# Altium PCB SX1308_V2.PcbDoc
Units mil, origin at the board's own origin, x right, y up, seen from the top; angles counter-clockwise.
Board outline 755 x 570 mil, 2 copper layers (Top Layer, Bottom Layer); 15 components, 7 nets, 33 pads, 42 vias.
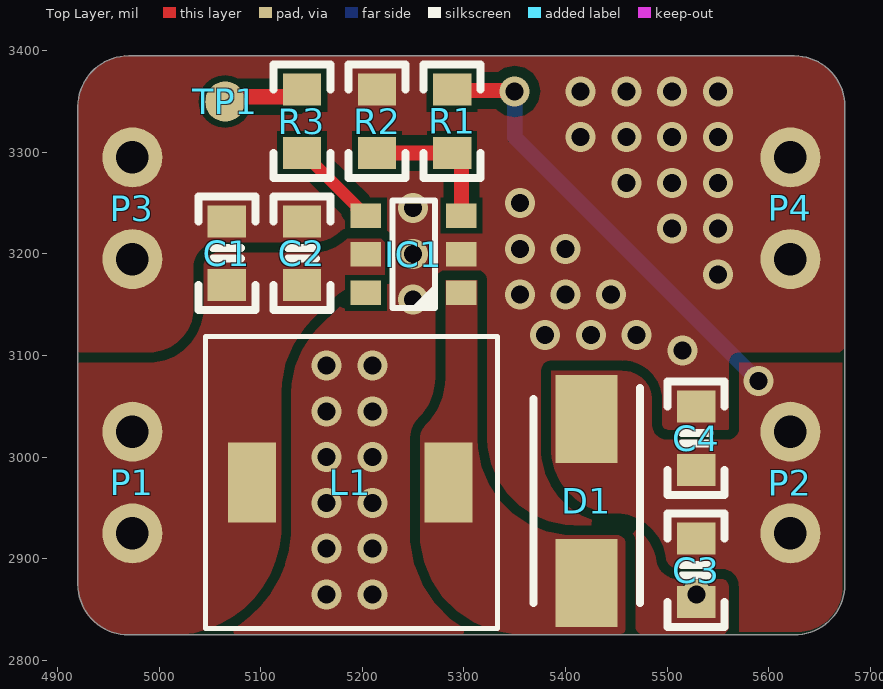
[diagram p0: Top Layer view]
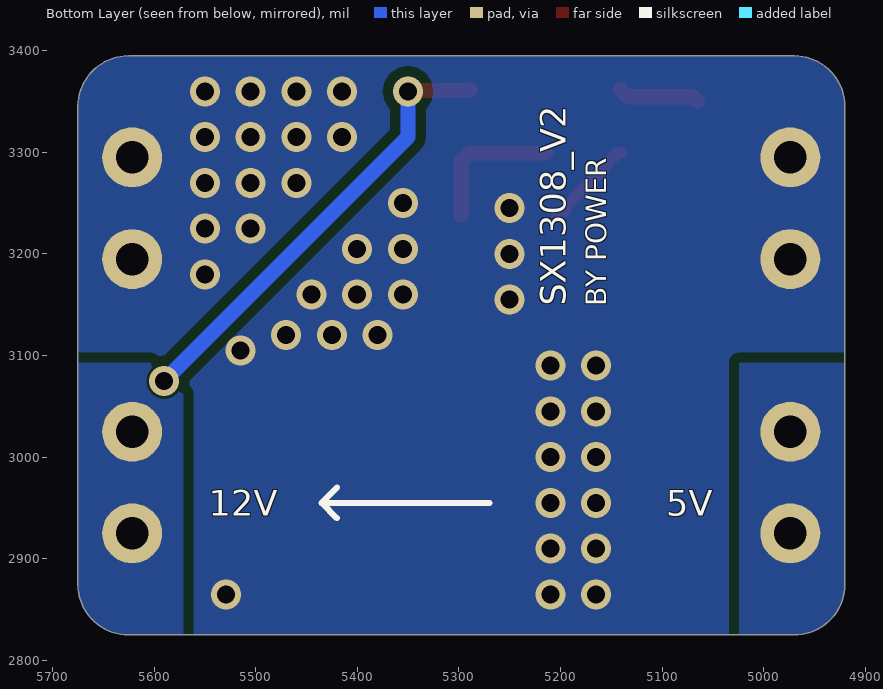
[diagram p1: Bottom Layer view, seen from below]
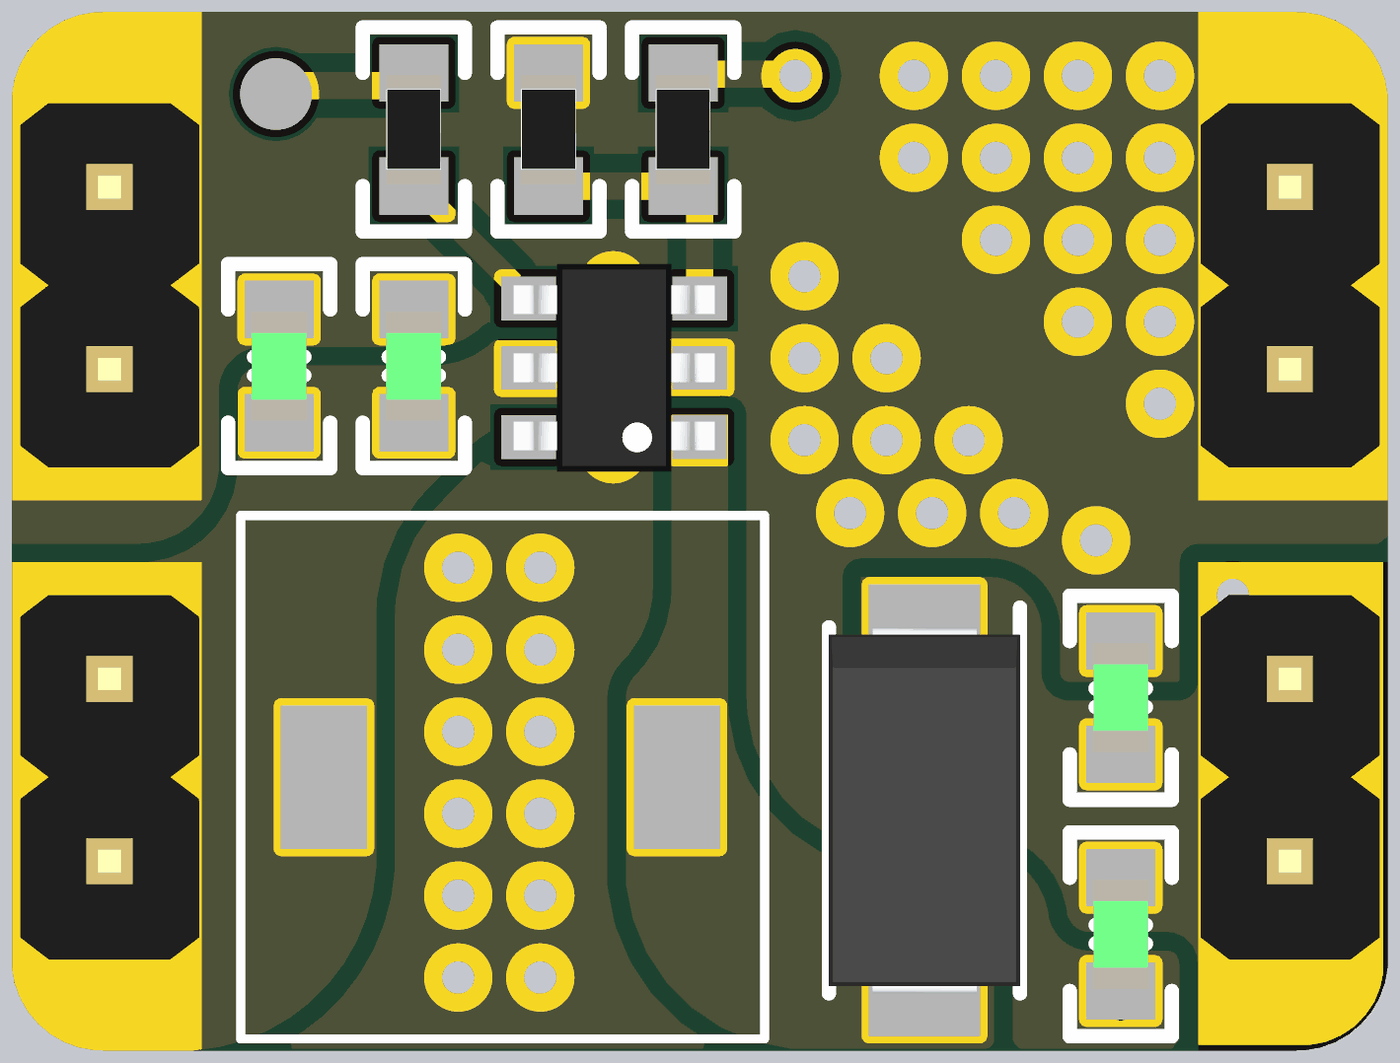
[diagram p2: 3D render of the assembled board from above, using the file's embedded part models]

## Layer stack, top to bottom
Top Solder: solder mask 0.4, Solder Resist, Dk 3.5
Top Layer: signal copper 1.4
Dielectric 1: dielectric 12.6, FR-4, Dk 4.8
Bottom Layer: signal copper 1.4
Bottom Solder: solder mask 0.4, Solder Resist, Dk 3.5

## Board outline
4920,2875 ccw(c4970,2875) 4970,2825 5625,2825 ccw(c5625,2875) 5675,2875 5675,3345 ccw(c5625,3345) 5625,3395 4970,3395 ccw(c4970,3345) 4920,3345

## Design rules (kind name [scope] priority, off if disabled: settings)
Clearance 1 [InNamedPolygon('NONET_L01_P-001')] p1: gap=10 ignorepadtopadclearanceinfootprint=FALSE except(0: Arc-Hole Track-Hole SMDPad-Hole THPad-Hole Via-Hole Fill-Hole Poly-Hole Region-Hole Text-Hole; 6: SMDPad-Fill SMDPad-Poly SMDPad-Region)
Clearance [All] p2: gap=10 ignorepadtopadclearanceinfootprint=FALSE except(0: Arc-Hole Track-Hole SMDPad-Hole THPad-Hole Via-Hole Fill-Hole Poly-Hole Region-Hole Text-Hole; 15: Arc-Fill Arc-Poly Arc-Region Track-Fill Track-Poly Track-Region SMDPad-Fill SMDPad-Poly SMDPad-Region THPad-Fill THPad-Poly THPad-Region Via-Fill Via-Poly Via-Region Fill-Fill Fill-Poly Fill-Region Poly-Poly Poly-Region Region-Region)
PlaneConnect [All] p1: planeconnectstyle=Direct reliefexpansion=20 reliefentries=4 reliefconductorwidth=10 reliefairgap=10
PolygonConnect [All] p1: connectstyle=Direct reliefconductorwidth=10 reliefentries=4 polygonreliefangle="90 Angle" airgapwidth=10
RoutingVias [All] p1: holewidth=17.72 width=29.53 viastyle="Through Hole" minholewidth=17.72 minwidth=29.53 maxholewidth=17.72 maxwidth=29.53
SolderMaskExpansion [All] p1: expansion=4 istentingtop=FALSE
Width [All] p1: maxlimit=100 minlimit=10 preferedwidth=15
29 further rules are at their usual default settings.

## Components (designator, comment, footprint, x,y, rotation, side; value= is the part's Value field where it differs from the comment)
C1 "10uF/25V" CAP-0603 5066.74,3200.66 r270 top
C2 "10uF/25V" CAP-0603 5140.62,3200.66 r270 top
C3 "10uF/25V" CAP-0603 5528.49,2888.74 r90 top
C4 "10uF/25V" CAP-0603 5528.49,3018.62 r270 top
D1 "SS34" DO-214AC_SMA 5420.8,2956.82 r270 top locked
IC1 "SX1308" SOT-23-6 5250.57,3199.72 r0 top
L1 "4.7uH/4A" SMD_7.3x7.3x4.2mm 5170.83,2960.43 r0 top locked
P1 "HDR1x2_2.54" HDR1X2_2.54_180 4973.79,3025 r0 top
P2 "HDR1x2_2.54" HDR1X2_2.54_180 5621.44,3025 r0 top
P3 "HDR1x2_2.54" HDR1X2_2.54_180 4973.79,3295 r0 top
P4 "HDR1x2_2.54" HDR1X2_2.54_180 5621.44,3295 r0 top
R1 "191k" R-0603 5288.39,3330.54 r90 top
R2 "10k" R-0603 5214.51,3330.54 r270 top
R3 "100k" R-0603 5140.62,3330.54 r270 top
TP1 "TestPoint" TestPoint 5065,3350 r90 top

## Footprints (in the part's own frame and the unit in brackets; to place one, negate y for a bottom-side part, rotate by r counter-clockwise, add the part's x,y. Pads: shape width x height; smd on the part's side, far side on the other; paste and mask are expansions set on the pad)
CAP-0603 [mm]
  rect 0.8x0.96 smd: 1(-0.79,0) 2(0.79,0)
  silkscreen extent -1.42,-0.71 1.42,0.71, body extent -0.76,-0.39 0.76,0.39, height 0.9
DO-214AC_SMA [mm]
  rect 2.2x1.55 smd: 1(2.05,0) 2(-2.05,0)
  silkscreen extent -2.83,-1.33 2.55,1.33, body extent -2.55,-1.33 2.55,1.33, height 2.29
HDR1X2_2.54_180 [mm]
  round 1.5 hole 0.813: 1(0,0) 2(0,-2.54)
  body extent -1.25,-3.81 1.25,1.27, height 8.2
R-0603 [mm]
  rect 0.8x0.96 smd: 1(-0.79,0) 2(0.79,0)
  silkscreen extent -1.42,-0.71 1.42,0.71, body extent -0.76,-0.38 0.76,0.38, height 0.41
SMD_7.3x7.3x4.2mm [mm]
  rect 1.2x2 smd: 1(-2.02,0.37) 2(2.9,0.37)
  silkscreen extent -3.18,-3.28 4.12,4.02, body extent -3.18,-3.28 4.1,4, height 3
SOT-23-6 [mil]
  rect 30x24 smd: 1(47,-38) 2(47,0) 3(47,38) 4(-47,38) 5(-47,0) 6(-47,-38)
  silkscreen extent -21,-53 21,53, body extent -55,-57 55,57, height 57
TestPoint [mm]
  round 1 smd: 1(0,0)

## Part data
C1 C2 C3 C4: library part CAP, "X7R", Package=0402, SuppliersPartNumber=C52923, ComponentLink1Description=供应商链接, ComponentLink1URL=http://www.szlcsc.com/product/details_53938.html, Supplier=LC
D1: library part DIODE, "肖特基二极管", Package=SMA(DO-214AC), SuppliersPartNumber=C22452, ComponentLink1Description=供应商链接, ComponentLink1URL=http://www.szlcsc.com/product/details_23178.html, Supplier=LC
IC1: "集成升压芯片", Manufacturer_Name="Shenzhen Suosemi Tech", Datasheet Link=https://datasheet.lcsc.com/szlcsc/Shenzhen-Suosemi-Tech-SX1308_C78162.pdf, Height=1.45mm, Manufacturer_Part_Number=SX1308
L1: library part INDUCTOR, "电感", Package=0402, SuppliersPartNumber=C32041, ComponentLink1Description=供应商链接, ComponentLink1URL=http://www.szlcsc.com/product/details_33003.html, Supplier=LC
P1 P2 P3 P4: "Header"
R1 R2 R3: library part RES, "贴片电阻", Package=0805, SuppliersPartNumber=C17798, Supplier=LC
TP1: "测试点"

## Via types
v1: diameter 29.53, hole 17.72, Top Layer to Bottom Layer, 42 vias

## Nets (pads, with @x,y where several pads share a name; then routed paths per layer and width w, separated by ;. In a path a pad name is that pad's centre, name@x,y a point inside that pad or via, vN(x,y) a via of type N, cw(c..) or ccw(c..) an arc to the next point about the centre after c; other vN are vias at no path point)
5V: C1.2 C2.2 IC1.5 L1.1 P1.1 P1.2
12V: C3.2 C4.2 D1.2 P2.1 P2.2 R1.2 | length 446.7
  Top Layer w15: R1.2 5289.21,3360.82 5349.18,3360.82 v1(5350,3360)
  Bottom Layer w15: v1(5350,3360) 5350,3315 v1(5590,3075)
GND: C1.1 C2.1 C3.1 C4.1 IC1.2 P3.1 P3.2 P4.1 P4.2 R2.1 | length 9.5
  Top Layer w12: C3.1 5526.13,2860 5529,2862.87 v1(5529,2865)
  other v1: 5165,2865 5210,2865 5165,2910 5210,2910 5165,2955 5210,2955 5165,3000 5210,3000 5165,3045 5210,3045 5165,3090 5210,3090 5515,3105 5380,3120 5425,3120 5470,3120 5250,3155 5355,3160 5400,3160 5445,3160 5550,3180 5250,3200 5355,3205 5400,3205 5505,3225 5550,3225 5250,3245 5355,3250 5460,3270 5505,3270 5550,3270 5415,3315 5460,3315 5505,3315 5550,3315 5415,3360 5460,3360 5505,3360 5550,3360
NetD1_1: D1.1 IC1.1 L1.2
NetIC1_3: IC1.3 R1.1 R2.2 | length 140
  Top Layer w15: R2.2 R1.1 5289.32,3299.44 5297.57,3291.19 IC1.3
NetIC1_4: IC1.4 R3.2 | length 91.4
  Top Layer w12: R3.2 5143.77,3299.44 5153.52,3289.69 5153.52,3287.77 5194.57,3246.72 5194.57,3243.72 5200.57,3237.72 IC1.4
NetR3_1: R3.1 TP1.1 | length 80.4
  Top Layer w15: TP1.1 5069.66,3354.66 5133.65,3354.66 R3.1
pads on no net: IC1.6

## Polygon pours and split planes (outlines as drawn)
GND on Top Layer "NONET_L01_P-001" (solid, pour order 4): 4970,3395 ccw(c4970,3345) 4920,3345 4920,2875 ccw(c4969,2875) 4969,2826 5626,2826 ccw(c5626,2875) 5675,2875 5675,3345 ccw(c5625,3345) 5625,3395
5V on Top Layer "NONET_L01_P-001" (solid, pour order 3): 5044,3187 cw(c5058,3187) 5058,3201 5151.2,3201 ccw(c5151.2,3248.8) 5185,3215 5222,3215 5222,3190 5222,3177 ccw(c5222,3104.58) 5170.79,3155.79 5149.29,3134.29 ccw(c5220,3063.58) 5120,3063.58 5120,3018 5120,2932 cw(c5013.01,2931.99) 5013,2825 4969,2825 cw(c4969,2874) 4920,2874 4920,3093 4990.5,3093 ccw(c4990.5,3146.5) 5044,3146.5
12V on Top Layer "NONET_L01_P-001" (solid, pour order 1): 5447.43,2944.62 cw(c5449.33,2894.54) 5499.27,2898.66 ccw(c5511.77,2903.34) 5511.78,2890 5554.52,2890 cw(c5554.52,2873.9) 5570.62,2873.9 cw(c5551.36,2870.04) 5571,2870 5571,2851.72 5571,2828 5628,2828 ccw(c5628,2872.59) 5672.59,2872.59 5672.59,3093 5571,3093 5571,3028 cw(c5560.01,3027.99) 5560,3017 5500,3017 cw(c5500,3032) 5485,3032 5485,3056 ccw(c5456,3056) 5456,3085 5386,3085 5386,3005 ccw(c5450.37,3009.06)
NetD1_1 on Top Layer "NONET_L01_P-001" (solid, pour order 2): 5313,3174 5313,3018 ccw(c5408,3018) 5408,2923 5451,2923 cw(c5451,2915) 5459,2915 5459,2831 cw(c5454,2831) 5454,2826 5357,2826 cw(c5357,2926) 5257,2926 5257,3018 cw(c5276.31,3018) 5262.66,3031.66 ccw(c5215.96,3078.35) 5282,3078.36 5282,3174
GND on Top Solder "NONET_L01_P-001" (solid): 5675,3127 5571,3127 5571,3395 5626,3395 cw(c5626,3346) 5675,3346
GND on Top Solder "NONET_L01_P-001" (solid): 4920.23,3127 5024.23,3127 5024.23,3395 4969.23,3395 ccw(c4969.23,3346) 4920.23,3346
5V on Top Solder "NONET_L01_P-001" (solid): 4920.23,3093 5024.23,3093 5024.23,2825 4969.23,2825 cw(c4969.23,2874) 4920.23,2874
12V on Top Solder "NONET_L01_P-001" (solid): 5675,3093 5571,3093 5571,2825 5626,2825 ccw(c5626,2874) 5675,2874
12V on Bottom Solder "NONET_L01_P-001" (solid): 5675,3093 5571,3093 5571,2825 5626,2825 ccw(c5626,2874) 5675,2874
5V on Bottom Solder "NONET_L01_P-001" (solid): 4920.23,3093 5024.23,3093 5024.23,2825 4969.23,2825 cw(c4969.23,2874) 4920.23,2874
GND on Bottom Solder "NONET_L01_P-001" (solid): 4920.23,3127 5024.23,3127 5024.23,3395 4969.23,3395 ccw(c4969.23,3346) 4920.23,3346
GND on Bottom Solder "NONET_L01_P-001" (solid): 5675,3127 5571,3127 5571,3395 5626,3395 cw(c5626,3346) 5675,3346
5V on Bottom Layer "NONET_L01_P-001" (solid, pour order 6): 4920.23,3093 5024.23,3093 5024.23,2825 4969.23,2825 cw(c4969.23,2874) 4920.23,2874
12V on Bottom Layer "NONET_L01_P-001" (solid, pour order 5): 5675,3093 5571,3093 5571,2825 5626,2825 ccw(c5626,2874) 5675,2874
GND on Bottom Layer "NONET_L01_P-001" (solid, pour order 9): 4970,3395 ccw(c4970,3345) 4920,3345 4920,2875 ccw(c4969,2875) 4969,2826 5626,2826 ccw(c5626,2875) 5675,2875 5675,3345 ccw(c5625,3345) 5625,3395

## Silkscreen, mask and mechanical layers (free items; w line width, h text height)
Bottom Overlay:
  lines w6: 5270,2955 5435,2955 ; 5420,2940 5435,2955 ; 5420,2970 5435,2955
  text "SX1308_V2" at 5194.59,3148.78 h25 r270
  text "BY POWER" at 5155,3148.36 h20 r270
  text "5V" at 5095.83,2942.5 h25
  text "12V" at 5546.24,2942.5 h25
Mechanical 1:
  lines w6: 4920,2875 ccw(c4970,2875) 4970,2825 5010,2825 5625,2825 ccw(c5625,2875) 5675,2875 5675,3345 ccw(c5625,3345) 5625,3395 4970,3395 ccw(c4970,3345) 4920,3345 4920,2875